# Altium PCB PCB1.PcbDoc
Units mil, origin at the board's own origin, x right, y up, seen from the top; angles counter-clockwise.
Board outline 6000 x 4000 mil, 2 copper layers (Top Layer, Bottom Layer); 15 components, 29 nets, 94 pads, 0 vias.
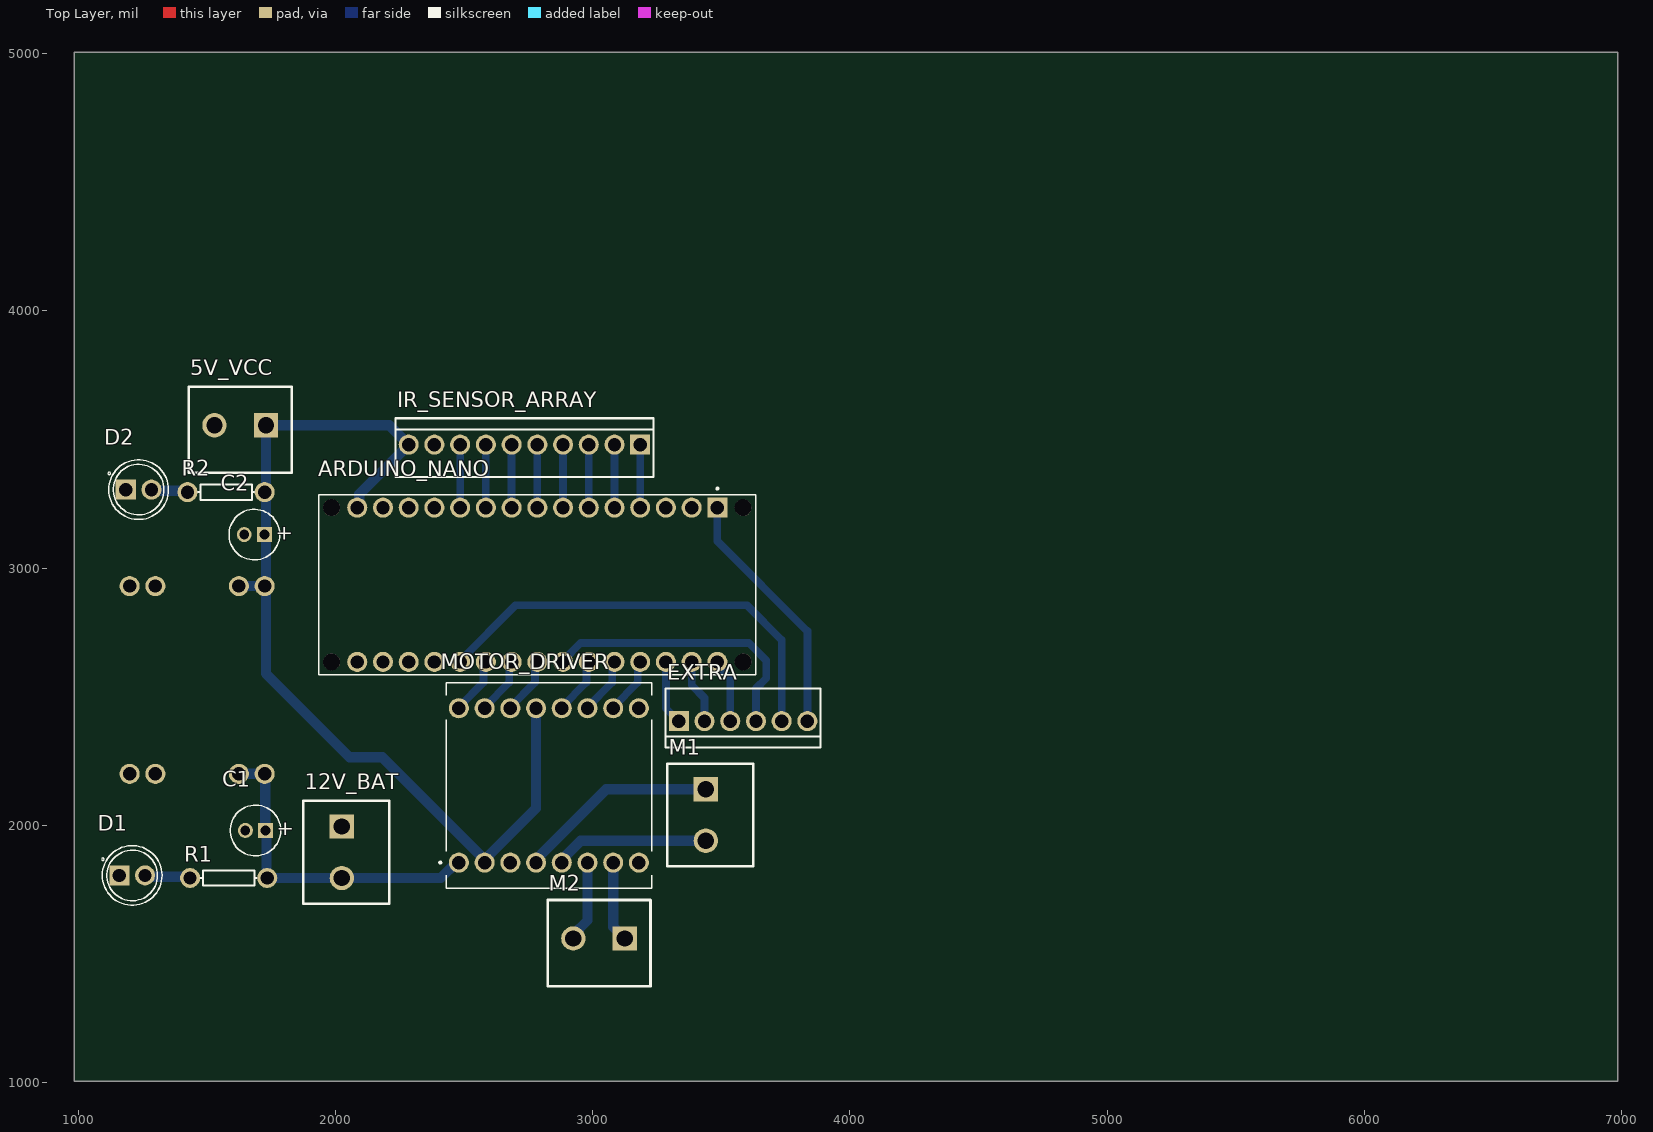
[diagram p0: Top Layer view]
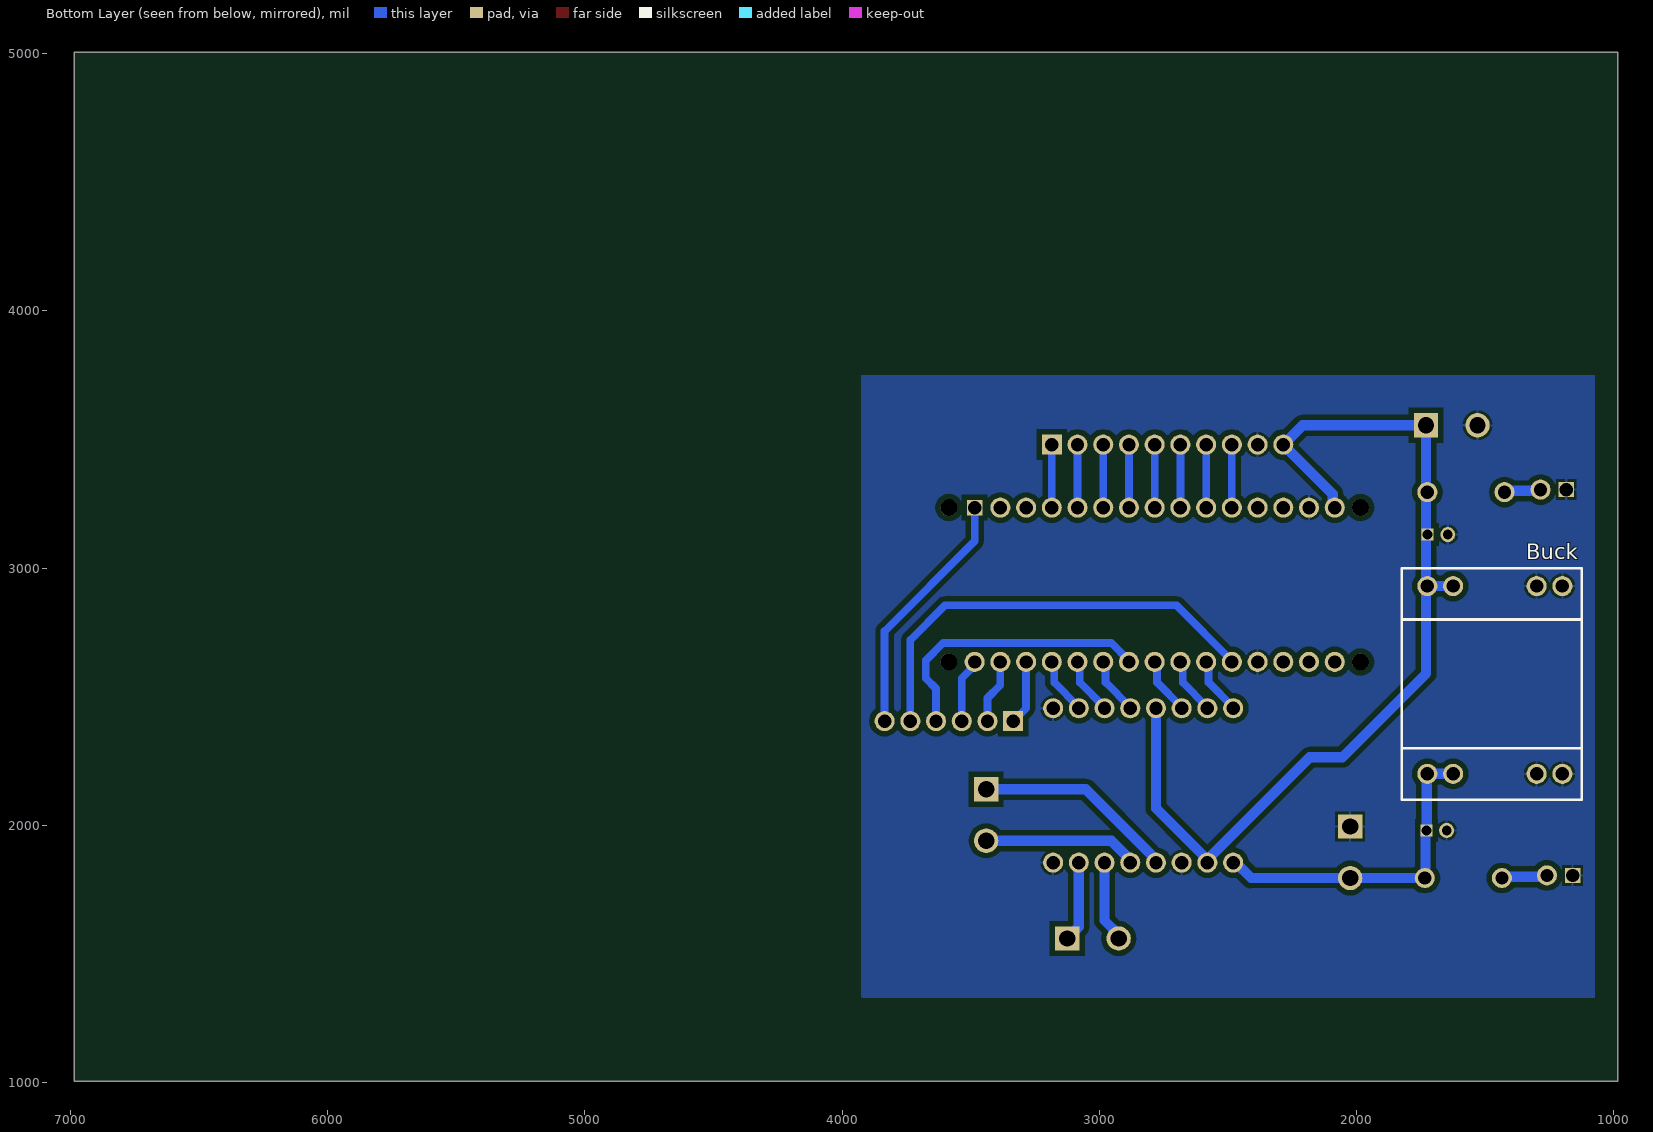
[diagram p1: Bottom Layer view, seen from below]
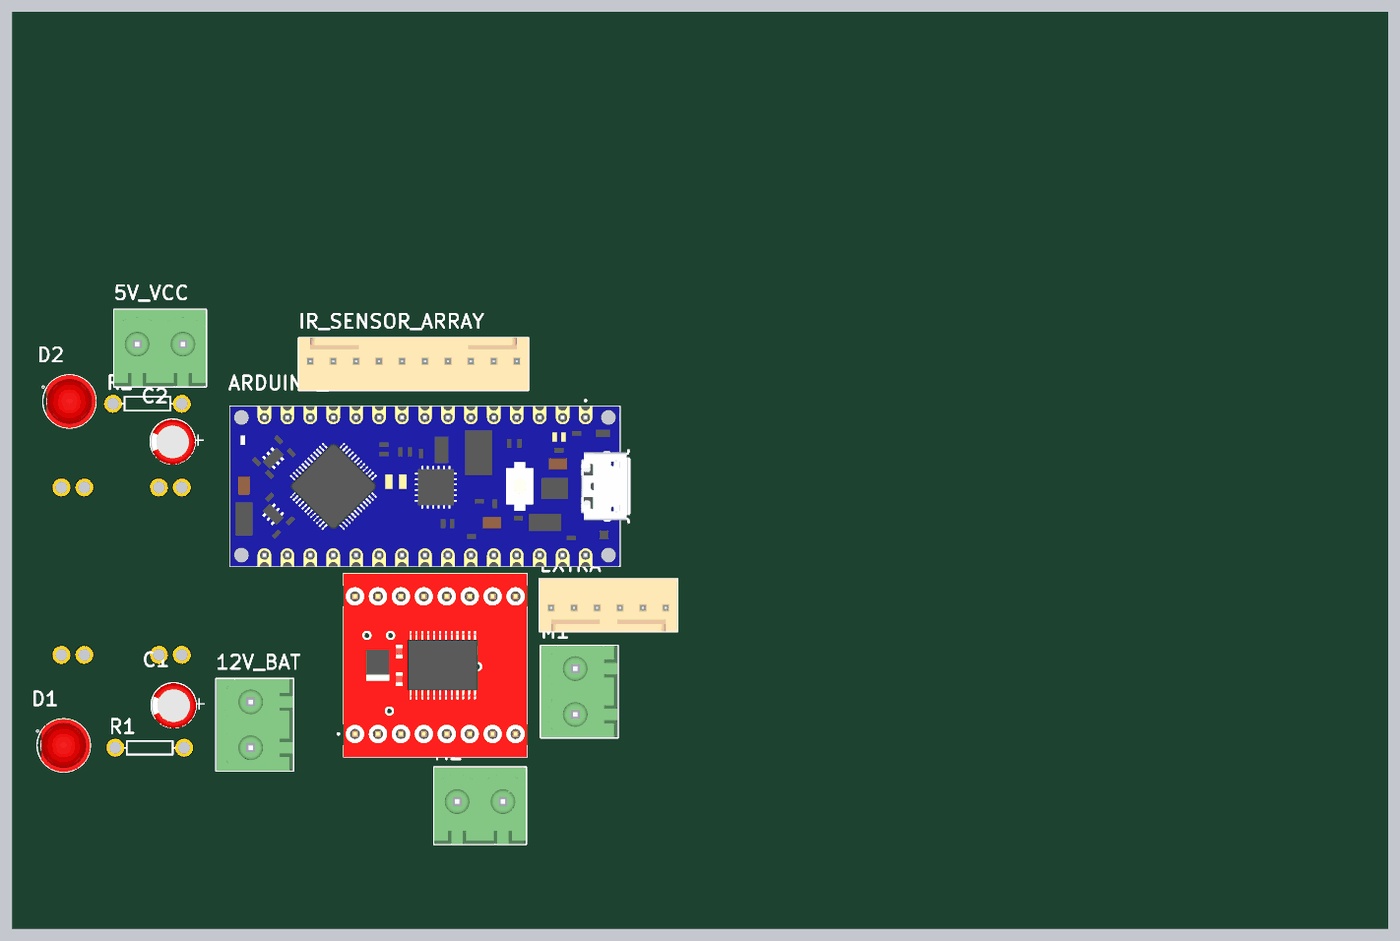
[diagram p2: 3D render of the assembled board from above, using the file's embedded part models]

## Layer stack, top to bottom
Top Solder: solder mask 0.4, Solder Resist, Dk 3.5
Top Layer: signal copper 1.4
Dielectric 1: dielectric 12.6, FR-4, Dk 4.8
Bottom Layer: signal copper 1.4
Bottom Solder: solder mask 0.4, Solder Resist, Dk 3.5

## Board outline
985,1005 6985,1005 6985,5005 985,5005

## Design rules (kind name [scope] priority, off if disabled: settings)
Clearance [All] p1: gap=20 ignorepadtopadclearanceinfootprint=FALSE
PolygonConnect [All] p1: connectstyle=Relief reliefconductorwidth=10 reliefentries=4 polygonreliefangle="90 Angle" airgapwidth=10
RoutingLayers [All] p1: top layer_v5=FALSE bottom layer_v5=TRUE
RoutingVias [All] p1: holewidth=28 width=50 viastyle="Through Hole" minholewidth=28 minwidth=50 maxholewidth=28 maxwidth=50
SolderMaskExpansion [All] p1: expansion=4 istentingtop=FALSE
Width [All] p1: maxlimit=40 minlimit=15 preferedwidth=30 minimp=50.000000 maximp=50.000000 favimp=50.000000
29 further rules are at their usual default settings.

## Components (designator, comment, footprint, x,y, rotation, side; value= is the part's Value field where it differs from the comment)
5V_VCC "691311500002" 691311500002 1630,3555 r180 top
12V_BAT "691311500002" 691311500002 2025,1895 r270 top
ARDUINO_NANO "ABX00028" MODULE_ABX00028 2785,2935 r180 top
Buck "MP1584 Buck Convertor" MP1584 1725,2200 r90 bottom
C1 "100 μF" "WCAP-AT1H 5x11x2x0.5" 1689.37,1980 r180 top
C2 "100 μF" "WCAP-AT1H 5x11x2x0.5" 1685,3130 r180 top
D1 "WP7113ID" LED_WP7113ID 1210,1805 r0 top
D2 "WP7113ID" LED_WP7113ID 1235,3305 r0 top
EXTRA "61900611121" 61900611121 3585,2405 r180 top
IR_SENSOR_ARRAY "61901011121" 61901011121 2735,3480 r0 top
M1 "691311500002" 691311500002 3440,2040 r270 top
M2 "691311500002" 691311500002 3025,1560 r180 top
MOTOR_DRIVER "ROB-14450" MODULE_ROB-14450 2830,2155 r90 top
R1 "Res1" AXIAL-0.3 1585,1795 r0 top value=1K
R2 "Res1" AXIAL-0.3 1575,3295 r0 top value=1K

## Footprints (in the part's own frame and the unit in brackets; to place one, negate y for a bottom-side part, rotate by r counter-clockwise, add the part's x,y. Pads: shape width x height; smd on the part's side, far side on the other; paste and mask are expansions set on the pad)
61900611121 [mil] "2.54mm Male Locking Header, 6p"
  rect 78x78 hole 52: 1(250,0)
  round 78 hole 52: 2(150,0) 3(50,0) 4(-50,0) 5(-150,0) 6(-250,0)
  silkscreen extent -301,-126 301,102, body extent -300,-126 300,102, height 455
61901011121 [mil] "2.54mm Male Locking Header, 10p"
  rect 78x78 hole 52: 1(450,0)
  round 78 hole 52: 2(350,0) 3(250,0) 4(150,0) 5(50,0) 6(-50,0) 7(-150,0) 8(-250,0) 9(-350,0) 10(-450,0)
  silkscreen extent -501,-126 501,102, body extent -500,-126 500,102, height 455
691311500002 [mm] "5,08mm - PCB Headers - Vertical - Opened ends -02p"
  rect 2.4x2.4 hole 1.6: 1(-2.54,0)
  round 2.4 hole 1.6: 2(2.54,0)
  silkscreen extent -5.08,-3.8 5.08,4.7, body extent -5.08,-3.8 5.08,4.7, height 12.02
AXIAL-0.3 [mil] "Axial Device, Thru-Hole; 2 Leads; 0.3 in Pin Spacing"
  round 78 hole 52: 1(-150,0) 2(150,0)
  silkscreen extent -109,-30 109,30
LED_WP7113ID [mil]
  round 78 hole 52: A(50,0)
  rect 78x78 / inner round 59.37 / far side rect 59.37x59.37 hole 52: C(-50,0)
  silkscreen extent -119,-116 116,116, body extent -98,-116 116,116, height 378
MODULE_ABX00028 [mil]
  rect 78x78 / inner round 60 / far side rect 60x60 hole 52: 1(-700,-300)
  round 78 hole 52: 2(-600,-300) 3(-500,-300) 4(-400,-300) 5(-300,-300) 6(-200,-300) 7(-100,-300) 8(0,-300) 9(100,-300) 10(200,-300) 11(300,-300) 12(400,-300) 13(500,-300) 14(600,-300) 15(700,-300) 16(700,300) 17(600,300) 18(500,300) 19(400,300) 20(300,300) 21(200,300) 22(100,300) 23(0,300) 24(-100,300) 25(-200,300) 26(-300,300) 27(-400,300) 28(-500,300) 29(-600,300) 30(-700,300)
  round 65 hole 65 unplated: ""(-800,-300) ""(-800,300) ""(800,-300) ""(800,300)
  silkscreen extent -850,-378 850,350, body extent -895,-350 850,350, height 236
MODULE_ROB-14450 [mm]
  round 1.98 hole 1.32: 1(-7.62,8.89) 2(-7.62,6.35) 3(-7.62,3.81) 4(-7.62,1.27) 5(-7.62,-1.27) 6(-7.62,-3.81) 7(-7.62,-6.35) 8(-7.62,-8.89) 9(7.62,-8.89) 10(7.62,-6.35) 11(7.62,-3.81) 12(7.62,-1.27) 13(7.62,1.27) 14(7.62,3.81) 15(7.62,6.35) 16(7.62,8.89)
  silkscreen extent -10.16,-10.16 10.16,10.83, body extent -10.16,-10.16 10.16,10.16, height 5.5
MP1584 [mil]
  round 78 hole 52: 1(0,0) 2(0,-100) 3(0,-425) 4(0,-525) 5(730,-525) 6(730,-425) 7(730,-100) 8(730,0)
  silkscreen extent -100,-600 800,100
"WCAP-AT1H 5x11x2x0.5" [mil] "Polarized capacitors, Aluminum Electrolytic Capacitors, 2-Leads, Body 5x11x2x0.5"
  rect 58x58 / inner rect 47.48x47.48 / far side rect 47.48x47.48 hole 38: 1(-39.37,0)
  round 58 hole 38: 2(39.37,0)
  silkscreen extent -98,-98 98,98, body extent -98,-96 98,100, height 443

## Part data
5V_VCC 12V_BAT M1 M2: "WR-TBL Serie 311 - 5.08 mm Open Vertical PCB Header, 02p", ComponentLink1Description=Manufacturer, ComponentLink1URL=http://www.we-online.de, ComponentLink2Description=Datasheet, ComponentLink2URL=http://katalog.we-online.de/em/datasheet/6913115000xx.pdf, Part Number=691311500002, Pin Number=02p, Pitch="5.08 mm", Published Date="Feb. 2017", Publisher="Wurth Elektronik"
ARDUINO_NANO: "Arduinoâ€™s 5V compatible board in the smallest available form factor: 45x18mm!", Package=None, Availability="Not in stock", Check_prices=https://www.snapeda.com/parts/Arduino%20Nano%20Every/Arduino/view-part/?ref=eda, MF=Arduino, MP="Arduino Nano Every", Price=None, SnapEDA_Link=https://www.snapeda.com/parts/Arduino%20Nano%20Every/Arduino/view-part/?ref=snap
C1 C2: library part "WCAP-AT1H 5x11x2x0.5 860240472002", "WCAP-AT1H Aluminum Electrolytic Capacitors , 33 μF; + / - 20%; 25 V , 5 x 11", Manufacturer="Wurth Elektronik", partNo=860240472002, Application="Medium and high voltage type range from 160V-450V used as primary side input filter in power supply; Low voltage type used as energy storage or low frequency filtering in circuit, applied to general switching power supply, AC-DC converter, adapter, charger, TV, VCR, DC motor circuit filter, digital audio, digital cameras, digital video cameras, satellite receiver etc.", Capacitance="100 μF", Characteristics="Aluminum Electrolytic Capacitor; Recommended soldering: Wave; Operating temperature:–40 °C to +105 °C for UR < 400 V; –25 °C to +105 °C for UR ≥ 400 V; Long life product series; Higher permissible ripple current; Load life: 5000–10000 h @ +105 °C", ComponentLink1Description=Manufacturer, ComponentLink1URL=http://www.we-online.com, ComponentLink2Description=Datasheet, ComponentLink2URL=http://katalog.we-online.de/pbs/datasheet/860240472002.pdf, Created by="Karrer Zheng", Created Date=6/8/2015, E-mail=libraries@we-online.com
D1 D2: "Red 617nm LED Indication - Discrete 2V Radial", Package="Radial Kingbright", Availability="In Stock", Check_prices=https://www.snapeda.com/parts/WP7113ID/Kingbright/view-part/?ref=eda, MF=Kingbright, MP=WP7113ID, Price=None, Purchase-URL=https://pricing.snapeda.com/search/part/WP7113ID/?ref=eda, SnapEDA_Link=https://www.snapeda.com/parts/WP7113ID/Kingbright/view-part/?ref=snap
EXTRA: "WR-WTB 2.54mm Male Locking Header, 6p", ComponentLink1Description=Manufacturer, ComponentLink1URL=http://www.we-online.de, ComponentLink2Description=Datasheet, ComponentLink2URL=http://katalog.we-online.de/em/datasheet/6190xx11121.pdf, Part Number=61900611121, Pin Number=6, Pitch="2.54 mm", Published Date="June 2017", Publisher="Wurth Elektronik"
IR_SENSOR_ARRAY: "WR-WTB 2.54mm Male Locking Header, 10p", ComponentLink1Description=Manufacturer, ComponentLink1URL=http://www.we-online.de, ComponentLink2Description=Datasheet, ComponentLink2URL=http://katalog.we-online.de/em/datasheet/6190xx11121.pdf, Part Number=61901011121, Pin Number=10, Pitch="2.54 mm", Published Date="June 2017", Publisher="Wurth Elektronik"
MOTOR_DRIVER: "TB6612FNG Motor Controller/Driver Power Management Evaluation Board", Package=None, Availability="In Stock", Check_prices=https://www.snapeda.com/parts/ROB-14450/SparkFun%20Electronics/view-part/2656367/?ref=eda, MF="SparkFun Electronics", MP=ROB-14450, Price=None, SnapEDA_Link=https://www.snapeda.com/parts/ROB-14450/SparkFun%20Electronics/view-part/2656367/?ref=snap
R1 R2: "Resistor", LatestRevisionDate=17-Jul-2002, LatestRevisionNote="Re-released for DXP Platform.", PackageDescription="Axial Device, Thru-Hole; 2 Leads; 0.3 in Pin Spacing", PackageReference=AXIAL-0.3, Published=8-Jun-2000, Publisher="Altium Limited"

## Nets (pads, with @x,y where several pads share a name; then routed paths per layer and width w, separated by ;. In a path a pad name is that pad's centre, name@x,y a point inside that pad or via, vN(x,y) a via of type N, cw(c..) or ccw(c..) an arc to the next point about the centre after c; other vN are vias at no path point)
5V_VCC: 5V_VCC.1 ARDUINO_NANO.15 Buck.7 Buck.8 C2.1 IR_SENSOR_ARRAY.10 MOTOR_DRIVER.2 MOTOR_DRIVER.13 R2.2 | length 3812.8
  Bottom Layer w40: Buck.7 Buck.8 ; ARDUINO_NANO.15 2092.27,3242.27 2092.27,3287.27 IR_SENSOR_ARRAY.10 2210,3555 5V_VCC.1 1730,2590 2055,2265 2181.69,2265 2558.98,1887.71 2558.98,1886.29 MOTOR_DRIVER.2@2580,1865.27 ; MOTOR_DRIVER.2 MOTOR_DRIVER.2@2580,1865.27 ; MOTOR_DRIVER.13 2780,2066.69 2601.02,1887.71 2601.02,1886.29 MOTOR_DRIVER.2@2580,1865.27
+12_V: 12V_BAT.2 Buck.1 Buck.2 C1.1 MOTOR_DRIVER.1 R1.2 | length 1279
  Bottom Layer w40: Buck.2 Buck.1 1726.87,2198.13 1726.87,1981.87 C1.1 1731.87,1976.87 1731.87,1798.13 R1.2 12V_BAT.2 2409.73,1795 2469.73,1855 MOTOR_DRIVER.1
A0_IR1: ARDUINO_NANO.4 IR_SENSOR_ARRAY.1 | length 252.1
  Bottom Layer w30: ARDUINO_NANO.4@3182.5,3237.5 ARDUINO_NANO.4 IR_SENSOR_ARRAY.1 IR_SENSOR_ARRAY.1@3187.5,3477.5
A1_IR2: ARDUINO_NANO.5 IR_SENSOR_ARRAY.2 | length 252.1
  Bottom Layer w30: ARDUINO_NANO.5@3082.5,3237.5 ARDUINO_NANO.5 IR_SENSOR_ARRAY.2 IR_SENSOR_ARRAY.2@3087.5,3477.5
A01_M1POS: M1.1 MOTOR_DRIVER.4 | length 792
  Bottom Layer w30: MOTOR_DRIVER.4@2775,1860 MOTOR_DRIVER.4
  Bottom Layer w40: MOTOR_DRIVER.4 2780,1865.27 2801.02,1886.29 2801.02,1887.71 3053.31,2140 M1.1
A2_IR3: ARDUINO_NANO.6 IR_SENSOR_ARRAY.3 | length 252.1
  Bottom Layer w30: ARDUINO_NANO.6@2982.5,3237.5 ARDUINO_NANO.6 IR_SENSOR_ARRAY.3 IR_SENSOR_ARRAY.3@2987.5,3477.5
A02_M1NEG: M1.2 MOTOR_DRIVER.5 | length 602.1
  Bottom Layer w40: MOTOR_DRIVER.5 2880,1865.27 2901.02,1886.29 2901.02,1887.71 2953.31,1940 M1.2
A3_IR4: ARDUINO_NANO.7 IR_SENSOR_ARRAY.4 | length 252.1
  Bottom Layer w30: ARDUINO_NANO.7@2882.5,3237.5 ARDUINO_NANO.7 IR_SENSOR_ARRAY.4 IR_SENSOR_ARRAY.4@2887.5,3477.5
A4_IR5: ARDUINO_NANO.8 IR_SENSOR_ARRAY.5 | length 252.1
  Bottom Layer w30: ARDUINO_NANO.8@2782.5,3237.5 ARDUINO_NANO.8 IR_SENSOR_ARRAY.5 IR_SENSOR_ARRAY.5@2787.5,3477.5
A5_IR6: ARDUINO_NANO.9 IR_SENSOR_ARRAY.6 | length 252.1
  Bottom Layer w30: ARDUINO_NANO.9@2682.5,3237.5 ARDUINO_NANO.9 IR_SENSOR_ARRAY.6 IR_SENSOR_ARRAY.6@2687.5,3477.5
A6_IR7: ARDUINO_NANO.10 IR_SENSOR_ARRAY.7 | length 252.1
  Bottom Layer w30: ARDUINO_NANO.10@2582.5,3237.5 ARDUINO_NANO.10 IR_SENSOR_ARRAY.7 IR_SENSOR_ARRAY.7@2587.5,3477.5
A7_IR8: ARDUINO_NANO.11 IR_SENSOR_ARRAY.8 | length 252.1
  Bottom Layer w30: ARDUINO_NANO.11@2482.5,3237.5 ARDUINO_NANO.11 IR_SENSOR_ARRAY.8 IR_SENSOR_ARRAY.8@2487.5,3477.5
B01_M2POS: M2.1 MOTOR_DRIVER.7 | length 324.6
  Bottom Layer w30: MOTOR_DRIVER.7 MOTOR_DRIVER.7@3087.75,1847.25
  Bottom Layer w40: MOTOR_DRIVER.7 3080,1605 M2.1
B02_M2NEG: M2.2 MOTOR_DRIVER.6 | length 322.4
  Bottom Layer w30: MOTOR_DRIVER.6 MOTOR_DRIVER.6@2980,1859.62
  Bottom Layer w40: M2.2 2925,1574.74 2980,1629.74 MOTOR_DRIVER.6
D2_5: ARDUINO_NANO.20 EXTRA.5 | length 1714.8
  Bottom Layer w30: ARDUINO_NANO.20 2485,2639.65 2700.35,2855 3600,2855 3735,2720 EXTRA.5
D3_PWMA: ARDUINO_NANO.21 MOTOR_DRIVER.16 | length 230.6
  Bottom Layer w30: MOTOR_DRIVER.16 2480,2459.62 2575.82,2555.43 2575.82,2625.82 ARDUINO_NANO.21 ARDUINO_NANO.21@2590,2630
D4_AI2: ARDUINO_NANO.22 MOTOR_DRIVER.15 | length 230.6
  Bottom Layer w30: MOTOR_DRIVER.15 2580,2459.62 2675.82,2555.43 2675.82,2625.82 ARDUINO_NANO.22 ARDUINO_NANO.22@2690,2630
D5_AI1: ARDUINO_NANO.23 MOTOR_DRIVER.14 | length 230.6
  Bottom Layer w30: MOTOR_DRIVER.14 2680,2459.62 2775.82,2555.43 2775.82,2625.82 ARDUINO_NANO.23 ARDUINO_NANO.23@2790,2630
D6_4: ARDUINO_NANO.24 EXTRA.4 | length 1103.8
  Bottom Layer w30: ARDUINO_NANO.24 2885,2639.65 2954.35,2709 3606.46,2709 3675,2640.46 3675,2571.72 3635,2531.72 EXTRA.4
D7_BI1: ARDUINO_NANO.25 MOTOR_DRIVER.12 | length 230.6
  Bottom Layer w30: MOTOR_DRIVER.12 2880,2459.62 2975.82,2555.43 2975.82,2625.82 ARDUINO_NANO.25 ARDUINO_NANO.25@2990,2630
D8_BI2: ARDUINO_NANO.26 MOTOR_DRIVER.11 | length 227
  Bottom Layer w30: MOTOR_DRIVER.11@2982.5,2457.5 MOTOR_DRIVER.11 2980,2459.62 3075.82,2555.43 3075.82,2625.82 ARDUINO_NANO.26
D9_PWMB: ARDUINO_NANO.27 MOTOR_DRIVER.10 | length 227
  Bottom Layer w30: MOTOR_DRIVER.10@3082.5,2457.5 MOTOR_DRIVER.10 3080,2459.62 3175.82,2555.43 3175.82,2625.82 ARDUINO_NANO.27
D10_1: ARDUINO_NANO.28 EXTRA.1 | length 250.7
  Bottom Layer w30: ARDUINO_NANO.28 3285,2455 EXTRA.1
D11_2: ARDUINO_NANO.29 EXTRA.2 | length 261
  Bottom Layer w30: ARDUINO_NANO.29 3385,2545 3435,2495 EXTRA.2
  Bottom Layer w40: EXTRA.2@3427.73,2412.27 EXTRA.2
D12_3: ARDUINO_NANO.30 EXTRA.3 | length 250.7
  Bottom Layer w30: ARDUINO_NANO.30 3485,2622.01 3535,2572.01 EXTRA.3
D13_6: ARDUINO_NANO.1 EXTRA.6 | length 975
  Bottom Layer w30: ARDUINO_NANO.1 3485,3105 3835,2755 EXTRA.6
GND: 5V_VCC.2 12V_BAT.1 ARDUINO_NANO.14 ARDUINO_NANO.19 Buck.3 Buck.4 Buck.5 Buck.6 C1.2 C2.2 D1.C D2.C IR_SENSOR_ARRAY.9 MOTOR_DRIVER.3 MOTOR_DRIVER.8 MOTOR_DRIVER.9
NetD1_A: D1.A R1.1 | length 179.1
  Bottom Layer w40: D1.A 1265,1800 1430,1800 R1.1
NetD2_A: D2.A R2.1 | length 144.1
  Bottom Layer w40: D2.A 1290,3300 1420,3300 R2.1
pads on no net: ARDUINO_NANO. ARDUINO_NANO.2 ARDUINO_NANO.3 ARDUINO_NANO.12 ARDUINO_NANO.13 ARDUINO_NANO.16 ARDUINO_NANO.17 ARDUINO_NANO.18

## Polygon pours and split planes (outlines as drawn)
GND on Bottom Layer "GND_L02_P000" (solid, remove dead copper, pour order 0): 1075,3750 3925,3750 3925,1325 3920,1330 1075,1330

## Text inside footprints (layer, text, board x,y; h text height)
C1: Top Overlay "+" at 1839.96,2009.02 h59.06 r180
C2: Top Overlay "+" at 1835.59,3159.02 h59.06 r180